# Altium PCB Schematic.pcbdoc
Units mm, origin at the board's own origin, x right, y up, seen from the top; angles counter-clockwise.
Board outline 74.8 x 54.3 mm, 2 copper layers (Top Layer, Bottom Layer); 33 components, 33 nets, 114 pads, 93 vias.
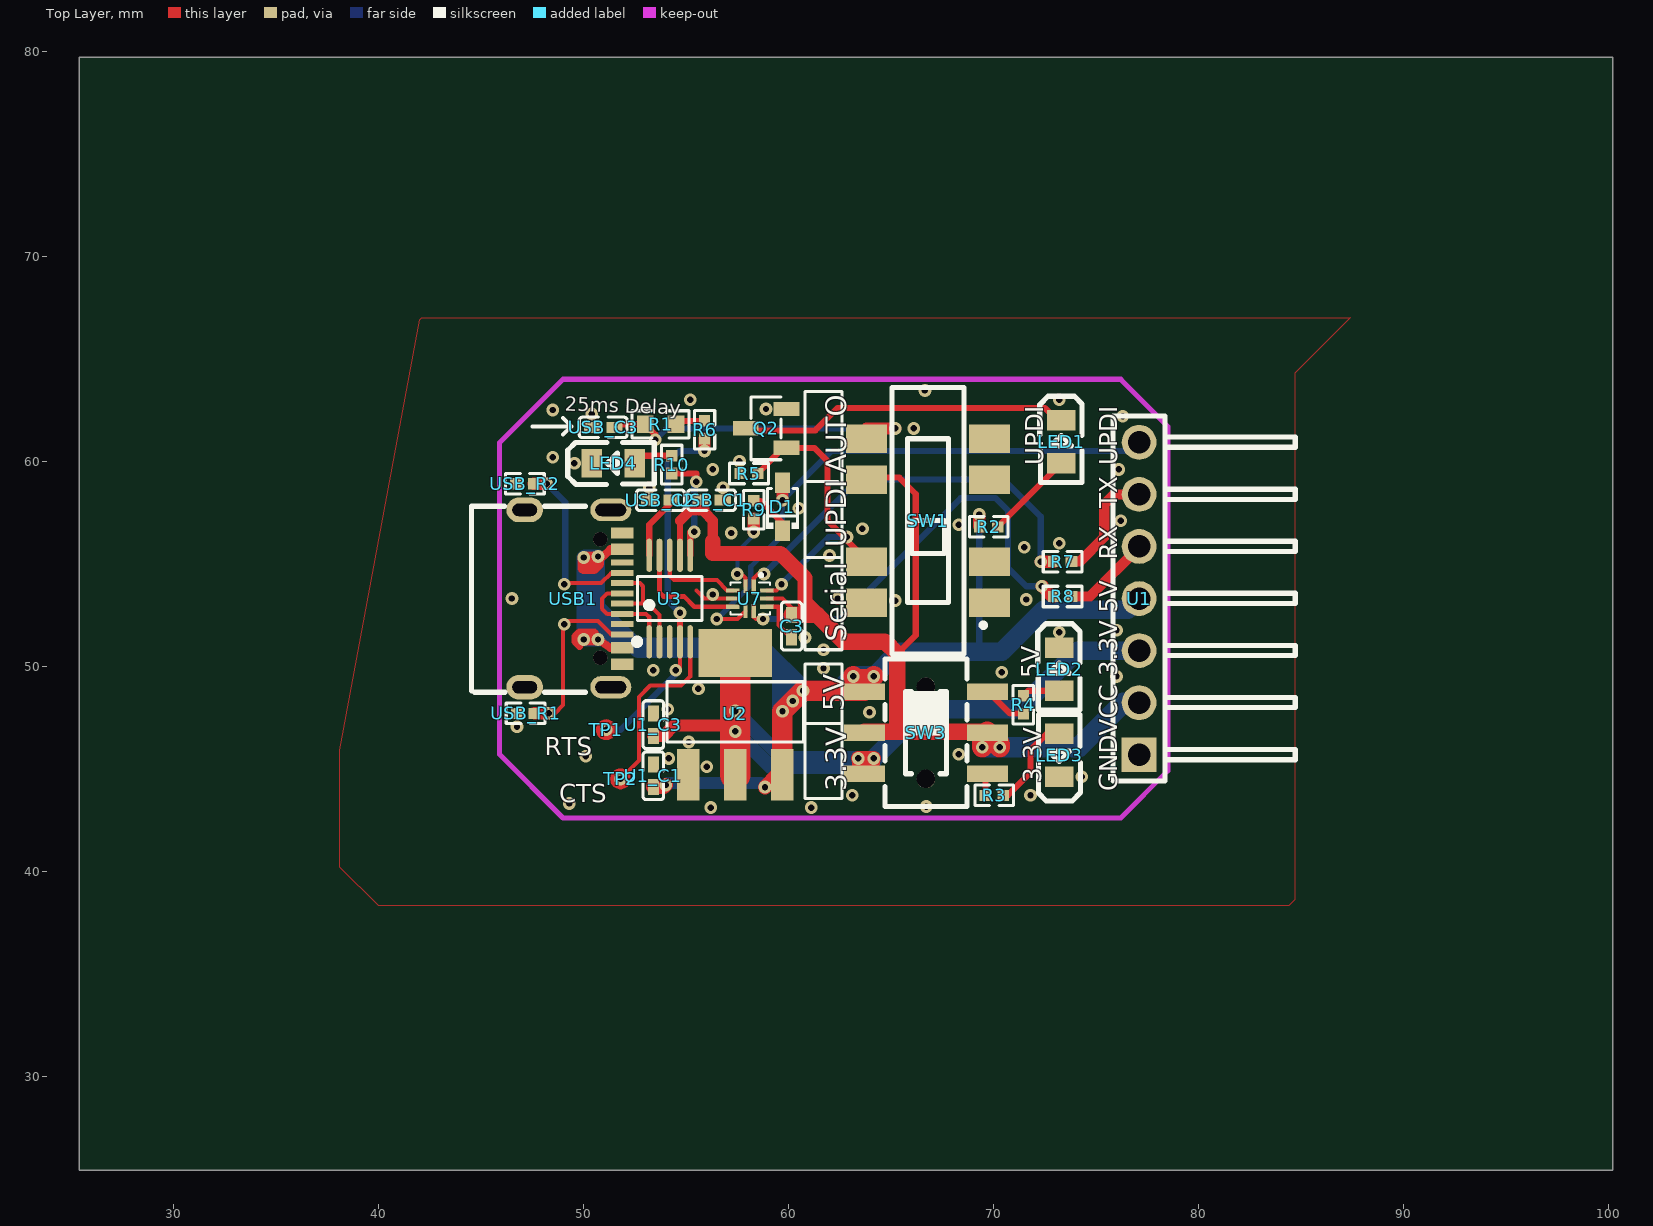
[diagram p0: Top Layer view]
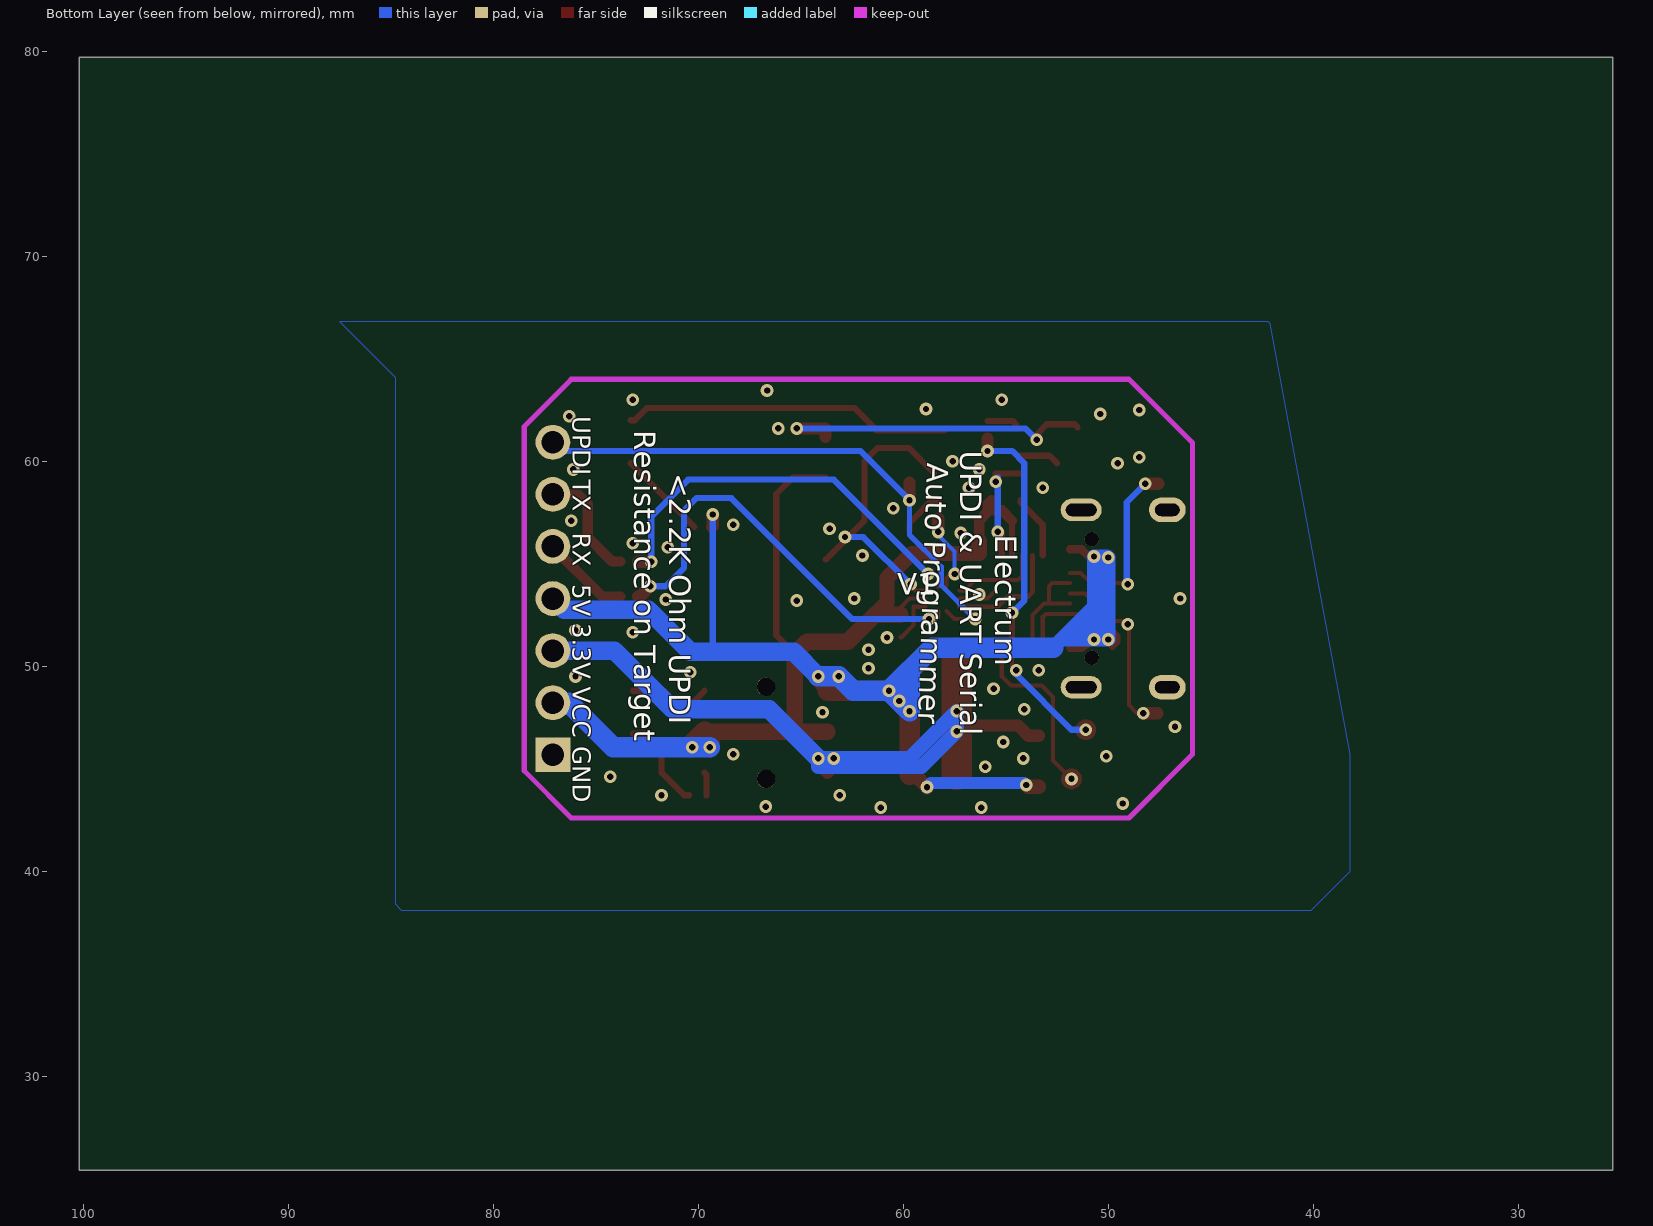
[diagram p1: Bottom Layer view, seen from below]

## Layer stack, top to bottom
Top Layer: signal copper (thickness not stored)
Dielectric: dielectric 0.32, FR-4, Dk 4.8
Bottom Layer: signal copper (thickness not stored)

## Board outline
100.2,25.4 25.4,25.4 25.4,79.7 100.2,79.7

## Components (designator, comment, footprint, x,y, rotation, side; value= is the part's Value field where it differs from the comment)
C3 "100nF" C0402 60.15,51.955 r90 top
D1 "1N5819WS" SOD-323_L1.8-W1.3-LS2.5-RD 59.7,57.772 r90 top
LED1 "Green" LED0805-R-RD 73.3,60.95 r270 top
LED2 "Red" LED0805-R-RD 73.2,49.85 r270 top
LED3 "Green" LED0805-R-RD 73.2,45.65 r90 top
LED4 "Green" LED0805-R-RD 51.45,59.9 r0 top
Q2 "AO3400A" SOT-23-3_L2.9-W1.3-P1.90-LS2.4-BR 58.9,61.6 r0 top
R1 "120kΩ" R0603 53.753,61.8 r0 top
R2 "2kΩ" R0402 69.767,56.8 r0 top
R3 "1kΩ" R0402 70.033,43.7 r0 top
R4 "1kΩ" R0402 71.45,48.117 r90 top
R5 "1MΩ" R0402 58.067,59.4 r180 top
R6 "5.1kΩ" R0402 55.9,61.533 r270 top
R7 "1kΩ" R0402 73.367,55.1 r0 top
R8 "1kΩ" R0402 73.367,53.4 r0 top
R9 "470Ω" R0402 58.3,57.633 r90 top
R10 "2kΩ" R0402 54.3,59.833 r90 top
SW1 "MST23D18G2 125" SW-SMD_SHOU_MST23D18G2 66.8,57.1 r90 top
SW3 "MS-22D28-G020" SW-SMD_MS-22D28-G020 66.7,46.75 r90 top
TP1 "TESTPOINT" TEST_TESTPOINT 51.1,46.9 r0 top
TP2 "TESTPOINT" TEST_TESTPOINT 51.8,44.5 r0 top
U1 "X6511WR-07H-C30D60R1" HDR-TH_7P-P2.54-H-M-W7.7-P 77.1,53.3 r90 top
U1_C1 "10uF" C0402 53.4,44.655 r90 top
U1_C3 "10uF" C0402 53.4,47.145 r270 top
U2 "AMS1117-3.3" SOT-223-3_L6.5-W3.4-P2.30-LS7.0-BR 57.4,47.67 r270 top
U3 "CH340E" MSOP-10_L3.0-W3.0-P0.50-LS5.0-BL 54.2,53.3 r0 top
U7 "RS2228XUTQK10" WQFN-10_L1.8-W1.4-P0.40-BL 58.1,53.3 r180 top
USB1 "TYPE-C 16PIN 2MD(073)" USB-C-SMD_TYPE-C-6PIN-2MD-073 49.5,53.3 r270 top
USB_C1 "100nF" C0402 56.245,58.1 r180 top
USB_C2 "100nF" C0402 53.745,58.1 r180 top
USB_C3 "100nF" C0402 50.955,61.65 r0 top
USB_R1 "5.1kΩ" R0402 47.167,47.7 r180 top
USB_R2 "5.1kΩ" R0402 47.133,58.9 r180 top

## Footprints (in the part's own frame and the unit in brackets; to place one, negate y for a bottom-side part, rotate by r counter-clockwise, add the part's x,y. Pads: shape width x height; smd on the part's side, far side on the other; paste and mask are expansions set on the pad)
C0402 [mm]
  rect 0.79x0.54 smd paste-100 mask+0.051: 1(-0.545,0) 2(0.545,0)
  silkscreen extent -1.17,-0.5 1.17,0.5
HDR-TH_7P-P2.54-H-M-W7.7-P [mm]
  rect 1.7x1.7 hole 1.1 paste+0 mask+0.05: 1(-7.62,0)
  round 1.7 hole 1.1 paste+0 mask+0.05: 2(-5.08,0) 3(-2.54,0) 4(0,0) 5(2.54,0) 6(5.08,0) 7(7.62,0)
  silkscreen extent -8.9,-7.62 8.9,1.27
LED0805-R-RD [mm]
  rect 1x1.4 smd paste+0 mask+0.051: 1(1.05,0) 2(-1.05,0)
  silkscreen extent -2.22,-1.04 1.99,1.01
MSOP-10_L3.0-W3.0-P0.50-LS5.0-BL [mm]
  oval 0.28x1.62 smd paste+0 mask+0.051: 1(-1,-2.11) 2(-0.5,-2.11) 3(0,-2.11) 4(0.5,-2.11) 5(1,-2.11) 6(1,2.11) 7(0.5,2.11) 8(0,2.11) 9(-0.5,2.11) 10(-1,2.11)
  silkscreen extent -1.74,-2.26 1.58,1.07
R0402 [mm]
  rect 0.566x0.54 smd paste-100 mask+0.051: 1(-0.433,0) 2(0.433,0)
  silkscreen extent -0.94,-0.5 0.94,0.5
R0603 [mm]
  rect 0.806x0.864 smd paste-100 mask+0.051: 1(-0.753,0) 2(0.753,0)
  silkscreen extent -1.39,-0.66 1.39,0.66
SOD-323_L1.8-W1.3-LS2.5-RD [mm]
  rect 1x0.75 smd paste+0 mask+0.051: 1(-1.173,0) 2(1.173,0)
  silkscreen extent -1.08,-0.8 0.9,0.8
SOT-23-3_L2.9-W1.3-P1.90-LS2.4-BR [mm]
  rect 1.25x0.7 smd paste+0 mask+0.051: 1(1,-0.95) 2(1,0.95) 3(-1,0)
  silkscreen extent -0.73,-1.53 0.73,1.53
SOT-223-3_L6.5-W3.4-P2.30-LS7.0-BR [mm]
  rect 2.5x1.1 smd paste+0 mask+0.051: 1(2.97,-2.3) 2(2.97,0) 3(2.97,2.3)
  rect 2.34x3.6 smd paste+0 mask+0.051: 4(-2.97,0)
  silkscreen extent -1.57,-3.33 1.37,3.33
SW-SMD_MS-22D28-G020 [mm]
  rect 0.8x2 smd paste+0 mask+0.051: 1(-2,3) 2(0,3) 3(2,3) 4(-2,-3) 5(0,-3) 6(2,-3)
  round 0.9 hole 0.9 unplated paste+0: ""(-2.25,0) ""(2.25,0)
  silkscreen extent -3.6,-2 3.6,2
SW-SMD_SHOU_MST23D18G2 [mm]
  rect 1.4x2 smd paste+0 mask+0.051: 1(-4,-3) 2(-2,-3) 3(2,-3) 4(4,-3) 5(4,3) 6(2,3) 7(-2,3) 8(-4,3)
  silkscreen extent -6.5,-2.8 6.5,1.75
TEST_TESTPOINT [mm]
  Top Layer region: -0.5,0 -0.496,0.06 -0.485,0.12 -0.468,0.177 -0.443,0.232 -0.411,0.284 -0.374,0.331 -0.331,0.374 -0.284,0.411 -0.232,0.443 -0.177,0.468 -0.12,0.485 -0.06,0.496 0,0.5 0,0.5 0.06,0.496 0.12,0.485 0.177,0.468 0.232,0.443 0.284,0.411 0.331,0.374 0.374,0.331 0.411,0.284 0.443,0.232 0.468,0.177 0.485,0.12 0.496,0.06 0.5,0 0.5,0 0.496,-0.06 0.485,-0.12 0.468,-0.177 0.443,-0.232 0.411,-0.284 0.374,-0.331 0.331,-0.374 0.284,-0.411 0.232,-0.443 0.177,-0.468 0.12,-0.485 0.06,-0.496 0,-0.5 0,-0.5 -0.06,-0.496 -0.12,-0.485 -0.177,-0.468 -0.232,-0.443 -0.284,-0.411 -0.331,-0.374 -0.374,-0.331 -0.411,-0.284 -0.443,-0.232 -0.468,-0.177 -0.485,-0.12 -0.496,-0.06
USB-C-SMD_TYPE-C-6PIN-2MD-073 [mm]
  rect 0.55x1.1 smd paste-100 mask+0.05: 1(-3.2,2.375) 2(-2.4,2.375) 11(2.4,2.375) 12(3.2,2.375)
  rect 0.3x1.1 smd paste-100 mask+0.05: 3(-1.75,2.375) 4(-1.25,2.375) 5(-0.75,2.375) 6(-0.25,2.375) 7(0.25,2.375) 8(0.75,2.375) 9(1.25,2.375) 10(1.75,2.375)
  oval 1.1x2 hole 0.6 slot 1.5 at 90 deg paste+0 mask+0.05: 13(-4.325,1.825) 14(4.325,1.825)
  oval 1.2x1.8 hole 0.6 slot 1.2 at 90 deg paste+0 mask+0.05: 13(-4.325,-2.375) 14(4.325,-2.375)
  round 0.7 hole 0.7 unplated paste+0: ""(-2.89,1.305) ""(2.891,1.305)
  silkscreen extent -4.5,-4.97 4.57,0.6
WQFN-10_L1.8-W1.4-P0.40-BL [mm]
  rect 0.2x0.75 smd paste+0 mask+0.051: 1(-0.2,-0.565)
  rect 0.2x0.665 smd paste+0 mask+0.051: 2(0.2,-0.607) 6(0.2,0.608) 7(-0.2,0.608)
  rect 0.665x0.2 smd paste+0 mask+0.051: 3(0.833,-0.4) 4(0.833,0) 5(0.833,0.4) 8(-0.832,0.4) 9(-0.832,0) 10(-0.832,-0.4)
  silkscreen extent -0.99,-1.21 0.93,0.79

## Via types
v1: diameter 0.62, hole 0.31, Top Layer to Bottom Layer, tented both sides, 93 vias

## Nets (pads, with @x,y where several pads share a name; then routed paths per layer and width w, separated by ;. In a path a pad name is that pad's centre, name@x,y a point inside that pad or via, vN(x,y) a via of type N, cw(c..) or ccw(c..) an arc to the next point about the centre after c; other vN are vias at no path point)
3.3V: SW3.1 U1.3 U1_C3.2 U2.2 U2.4 | length 45.3
  Top Layer w0.6: U1_C3.2 53.894,46.599 54.399,47.105 v1@57.399,47.105 ; v1(63.4,45.5) 63.4,45.1 63.7,44.8 64.15,45.25 v1(64.15,45.5)
  Top Layer w0.7: v1(63.4,45.5) v1(64.15,45.5)
  Top Layer w1: v1(57.4,46.818) v1(57.4,47.808)
  Top Layer w1.5: U2.2 U2.4
  Bottom Layer w0.7: v1(57.4,46.818) v1(57.4,47.808) 59.708,45.5 v1(63.4,45.5) v1(64.15,45.5) 64.15,45.1 59.118,45.1 v1(57.4,46.818)
  Bottom Layer w0.9: v1(64.15,45.5) 66.55,47.9 71.25,47.9 74.11,50.76 U1.3
5V: R2.1 SW3.3 U1.4 U1_C1.1 U2.3 USB1.2 USB1.11 | length 79.1
  Top Layer w0.4: v1(50,51.3) 49.901,51.199 49.799,50.999 49.601,51.199 49.601,51.451 49.799,51.649 50.5,51.649 v1(50.7,51.3) ; v1(50.7,51.3) 51.3,50.9 USB1.11 ; v1(50.7,55.35) 50.95,55.35 51.3,55.7 USB1.2
  Top Layer w0.6: v1(50,51.3) v1(50.7,51.3) ; v1(69.3,57.4) 69.3,56.834 R2.1 ; 50,54.8 50.5,54.8 50.7,55 v1(50.7,55.35) 50.65,55.3 v1(50,55.3) 50,54.8
  Top Layer w0.7: U1_C1.1 53.91,44.11 v1(54,44.2) ; v1(58.85,44.1) 59.45,44.7 U2.3 ; v1(63.15,49.5) v1(64.15,49.5)
  Top Layer w1: U2.3 v1(59.7,47.8) v1(60.198,48.298) v1(60.7,48.8) SW3.3@63.7,48.8 ; v1(63.15,49.5) 63.7,48.95 SW3.3@63.7,48.8 ; v1(64.15,49.5) 63.7,49.05 SW3.3@63.7,48.8
  Bottom Layer w0.3: 69.3,50.699 v1(69.3,57.4)
  Bottom Layer w0.6: v1(54,44.2) 54.1,44.3 58.65,44.3 v1(58.85,44.1)
  Bottom Layer w0.7: v1(50.7,51.3) 50,52.002 ; 51.3,51.8 51.2,51.8 v1(50.7,51.3) ; 50,52.002 v1(50,55.3) 50.05,55.35 v1(50.7,55.35) 50.7,52.9 ; 50,52.002 v1(50,51.3) v1(50.7,51.3) ; v1(50.7,51.3) 52.3,51.3 52.7,50.9 50.7,52.9 ; v1(50.7,51.3) 50.7,52.9
  Bottom Layer w0.9: v1(64.15,49.5) 65.349,50.699 70.399,50.699 72.451,52.749 76.548,52.749 U1.4
  Bottom Layer w1: 52.7,50.9 58.6,50.9 v1@60.701,48.799 ; 59.698,49.802 v1(59.7,47.8) v1(60.7,48.8) 62.45,48.8 v1(63.15,49.5) v1(64.15,49.5)
CTS: U3.5 | length 9
  Top Layer w0.2: v1(51.8,44.5) 52.7,45.4 52.7,48.5 53.25,49.05 54.75,49.05 55.2,49.5 U3.5@55.2,51.19
D1_1: D1.1 R9.2 | length 2.2
  Top Layer w0.3: R9.2 58.633,58.065 59.7,57.001 D1.1
DN: U3.2 USB1.5 USB1.7 | length 5.3
  Top Layer w0.2: USB1.7 53.15,53.05 53.7,52.5 U3.2@53.7,51.19 ; USB1.5 52.751,54.049 52.901,53.899 52.896,53.051
DP: U3.1 USB1.6 USB1.8 | length 5.3
  Top Layer w0.2: USB1.6@51.875,53.549 51.151,53.549 50.899,53.3 50.899,52.8 51.151,52.551 USB1.8 53.05,52.55 53.2,52.4 U3.1@53.2,51.19
GND: C3.1 LED2.2 LED3.2 LED4.2 Q2.2 R5.2 SW1.8 U1.1 U1_C1.2 U1_C3.1 U2.1 U3.3 U7.4 U7.8 USB1.1 USB1.12 USB1.13 USB1.14 USB_C1.1 USB_C2.2 USB_C3.1 USB_R1.2 USB_R2.2 | length 4.3
  Top Layer w0.2: 55.5,53.7 55.9,53.3 U7.4 ; U7.8 59.5,52.901 59.5,51.999 60.089,51.41 C3.1
  other v1: 56.2,43.1 61.1,43.1 66.715,43.15 49.3,43.3 63.1,43.7 71.8,43.7 74.3,44.6 56,45.1 54.15,45.5 50.1,45.6 68.3,45.7 55.128,46.298 46.75,47.05 63.95,47.75 54.1,47.9 55.6,48.9 76,49.5 70.4,49.7 53.4,49.8 61.7,49.9 61.7,50.8 60.8,51.4 73.2,51.65 76,51.75 65.2,53.2 71.6,53.25 46.5,53.3 62.4,53.3 56.3,53.5 62,55.4 71.5,55.8 73.2,56 57.2,56.5 63.6,56.7 68.3,56.9 76.2,57.1 60.5,57.7 53.2,58.7 56.8,58.7 56.3,59.6 76.1,59.6 49.55,59.9 57.6,60 48.5,60.2 66.1,61.6 76.3,62.2 50.4,62.3 48.5,62.5 58.9,62.55 55.2,63 73.2,63 66.65,63.45
LED1_1: LED1.1 R2.2 | length 4.4
  Top Layer w0.3: R2.2 LED1.1
LED1_2: LED1.2 Q2.3 | length 16.1
  Top Layer w0.3: Q2.3 58.001,61.499 61.3,61.499 62.4,62.599 72.499,62.599 73.099,61.999 LED1.2
LED4_1: LED4.1 R10.2 | length 2
  Top Layer w0.3: LED4.1 52.866,60.266 R10.2
LEDGREEN: R3.1 SW3.4 | length 1.1
  Top Layer w0.3: R3.1 69.6,44.7 SW3.4@69.7,44.8
LEDRED: R4.1 SW3.6 | length 2.2
  Top Layer w0.3: SW3.6@69.7,48.8 70.816,47.684 R4.1
R1_2: R1.2 R6.1 | length 1.5
  Top Layer w0.3: R1.2 54.672,61.966 R6.1
R3_2: LED3.1 R3.2 | length 4.6
  Top Layer w0.3: R3.2 70.7,43.7 71.8,44.8 71.8,45.9 72.6,46.7 LED3.1
R4_2: LED2.1 R4.2 | length 1.9
  Top Layer w0.3: R4.2 71.7,48.8 LED2.1
RTS: R6.2 U3.4 | length 17.9
  Top Layer w0.2: v1(54.5,49.8) 54.7,49.8 U3.4@54.7,51.19
  Top Layer w0.3: U3.4@54.7,51.19 v1(54.7,52.6)
  Top Layer w0.6: v1(55.9,60.5) R6.2
  Bottom Layer w0.3: v1(51.1,46.9) 51.8,46.9 54.5,49.6 v1(54.5,49.8) ; v1(54.7,52.6) 54.1,53.2 54.1,59.9 54.7,60.5 v1(55.9,60.5)
RXD: R8.2 U1.5 | length 4.3
  Top Layer w0.5: R8.2 74.7,53.4 77.1,55.8 U1.5
RXD_CH340: U3.9 U7.5 | length 5.7
  Top Layer w0.23: U3.9 53.701,53.6 53.901,53.399 54.9,53.399 55.4,52.899 U7.5@57.267,52.899
S: Q2.1 R5.1 SW1.7 U7.10 | length 14.8
  Top Layer w0.2: U7.10 59.4,53.7 59.65,53.95 v1(59.65,54)
  Top Layer w0.3: R5.1 59.75,60.65 Q2.1 61.25,60.65 61.9,60 61.9,57.1 SW1.7@63.8,55.2
  Bottom Layer w0.3: v1(59.65,54) 61.95,56.3 v1(62.85,56.3)
S$67284: 
S$79420: 
SW1_5: R1.1 SW1.5 USB_C3.2 | length 16.2
  Top Layer w0.3: USB_C3.2 51.65,61.8 R1.1 53.5,61.3 v1(53.5,61.05)
  Top Layer w0.6: SW1.5@63.8,61.2 63.8,61.6 v1(65.2,61.6)
  Bottom Layer w0.3: v1(53.5,61.05) 54.05,61.6 v1(65.2,61.6)
TXD: R7.2 U1.6 | length 5.6
  Top Layer w0.5: R7.2 74.201,55.101 75.4,56.3 75.4,57.9 75.88,58.38 U1.6
TXD_CH340: U3.8 U7.3 | length 4.4
  Top Layer w0.2: U3.8 54.201,54.4 54.399,54.199 56.5,54.199 57,53.699 U7.3@57.267,53.699
U3_6: R10.1 U3.6 | length 5.8
  Top Layer w0.3: R10.1 55.5,59.4 v1(55.5,59) ; U3.6 55.2,56.55 v1(55.4,56.55)
  Bottom Layer w0.3: v1(55.4,56.55) 55.4,59.2 55.5,59.1 v1(55.5,59)
U7_1: R7.1 U7.1 | length 20
  Top Layer w0.2: U7.1@58.301,53.864 58.301,54.301 58.499,54.499 v1@58.801,54.499
  Top Layer w0.6: v1(72.3,55.1) R7.1
  Bottom Layer w0.3: v1@58.801,54.499 63.401,59.099 70.5,59.099 72.299,57.3 v1@72.299,55.101
  other v1: 58.8,54.5
U7_2: R9.1 U7.2 | length 3.9
  Top Layer w0.2: v1(57.5,54.5) 57.7,54.5 57.9,54.3 U7.2
  Top Layer w0.6: v1(58.3,56.55) R9.1
  Bottom Layer w0.2: v1@57.501,54.499 57.501,55.599 58.301,56.399 v1@58.301,56.549
U7_7: R8.1 U7.7 | length 21.1
  Top Layer w0.2: U7.7 58.3,52.4 58.4,52.3 v1(58.75,52.3)
  Top Layer w0.6: v1(72.35,53.9) 72.85,53.4 R8.1 ; v1(72.35,53.9) v1@72.4,53.9
  Bottom Layer w0.3: v1@58.75,52.299 62.499,52.299 68.4,58.2 70.099,58.2 70.701,57.6 70.701,54.801 71.6,53.899 v1(72.35,53.9)
UPDI: D1.2 U1.7 U7.6 | length 28.3
  Top Layer w0.2: v1(56.5,52.3) 57.508,52.3 U7.6
  Top Layer w0.6: v1(59.7,58.1) D1.2
  Bottom Layer w0.25: v1(56.5,52.3) 58.15,53.95 58.15,54.85 59.7,56.4 v1(59.7,58.1)
  Bottom Layer w0.3: v1(59.7,58.1) 62.101,60.501 77.099,60.501 U1.7
USB_C2_1: U3.10 USB_C2.1 | length 3.1
  Top Layer w0.3: U3.10 53.2,56.9 54.29,57.99 USB_C2.1
USB_R1_1: USB1.10 USB_R1.1 | length 8.8
  Top Layer w0.2: v1(48.3,47.7) 48.6,47.7 49,48.1 49,52 v1(49.05,52.05) 49.05,52.2 50.701,52.2 51.349,51.55 USB1.10
  Top Layer w0.6: USB_R1.1 v1(48.3,47.7)
USB_R2_1: USB1.4 USB_R2.1 | length 9
  Top Layer w0.2: v1(49.05,54) 49.05,54.05 50.849,54.05 51.349,54.55 USB1.4
  Top Layer w0.6: USB_R2.1 v1(48.2,58.9)
  Bottom Layer w0.3: v1(48.2,58.9) 49.101,57.999 49.101,54.051 v1(49.05,54)
VCC: C3.2 SW1.6 SW3.2 SW3.5 U1.2 U3.7 U7.9 USB_C1.2 | length 53.2
  Top Layer w0.2: U7.9 59.7,53.3 60.15,52.85 C3.2
  Top Layer w0.3: U3.7 54.7,57.1 USB_C1.2 ; SW1.6@63.8,59.2 65.4,59.2 66.2,58.4 66.2,51.51 65.295,50.605
  Top Layer w0.5: 54.699,57.1 55.202,57.603 55.796,57.603 55.9,57.501 ; USB_C1.2 55.9,57.9 55.9,57.5 ; 56.3,56.1 56.3,57.1 55.9,57.5
  Top Layer w0.75: 56.3,56.1 56.299,55.5 59.599,55.5 60.8,54.301 60.8,53.099 61.4,52.5
  Top Layer w0.8: C3.2 61.4,52.5 62.7,51.199 64.699,51.199 65.296,50.605 65.296,46.8 ; SW3.2@63.7,46.8 SW3.5@69.7,46.8
  Top Layer w1: v1(69.45,46.05) 69.45,46.55 69.7,46.8 70.3,46.2 v1(70.3,46.05)
  Bottom Layer w1: v1(69.45,46.05) v1(70.3,46.05) 74.15,46.051 76.32,48.22 U1.2
pads on no net: SW1.1 SW1.2 SW1.3 SW1.4 SW3. USB1. USB1.3 USB1.9

## Polygon pours and split planes (outlines as drawn)
GND on Bottom Layer (solid): 42.1,66.7 42.2,66.8 87.5,66.8 84.8,64.1 84.8,38.4 84.5,38.1 40.1,38.1 38.2,40 38.2,45.7
GND on Top Layer (solid): 42,66.9 42.1,67 87.4,67 84.7,64.3 84.7,38.6 84.4,38.3 40,38.3 38.1,40.2 38.1,45.9

## Silkscreen, mask and mechanical layers (free items; w line width, h text height)
Top Overlay:
  lines w0.15: 60.8,43.55 62.6,43.55 62.6,50.1 60.8,50.1 60.8,43.55 ; 60.8,50.8 62.6,50.8 62.6,63.4 60.8,63.4 60.8,50.8
  lines w0.15 net S$67284: 60.8,59 62.4,59 ; 60.875,47.2 62.525,47.2 ; 60.9,55.3 62.55,55.3
  lines w0.2 net S$79420: 47.501,61.7 49.401,61.7 ; 49,61.3 49.401,61.7 ; 49.401,61.7 48.999,62.101 49.401,61.7
  text "25ms Delay" at 49.088,62.45 h0.7 r358
  text "UPDI" at 72.435,59.8 h0.87 r90
  text "UPDI" at 76.035,59.8 h0.87 r90
  text "AUTO" at 62.8,59.4 h1 r90
  text "TX" at 76.035,57.7 h0.87 r90
  text "UPDI" at 62.8,55.8 h1 r90
  text "RX" at 76.035,55.2 h0.87 r90
  text "5V" at 76.035,52.6 h0.87 r90
  text "Serial" at 62.8,51.2 h1 r90
  text "3.3V" at 76.035,49.5 h0.87 r90
  text "5V" at 72.235,49.4 h0.87 r90
  text "5V" at 62.7,47.8 h1 r90
  text "VCC" at 76.035,46.6 h0.87 r90
  text "RTS" at 48.1,45.665 h0.87
  text "3.3V" at 72.335,44.3 h0.87 r90
  text "3.3V" at 62.8,43.9 h1 r90
  text "GND" at 76.035,43.9 h0.87 r90
  text "CTS" at 48.8,43.365 h0.87
Bottom Overlay:
  text "UPDI" at 76.135,62.2 h0.87 r90
  text "Resistance on Target" at 73.125,61.5 h1.05 r90
  text "UPDI & UART Serial" at 57.225,60.5 h1.05 r90
  text "Auto Programmer" at 58.825,59.918 h1.05 r92
  text "<2.2K Ohm UPDI" at 71.425,59.4 h1.05 r90
  text "TX" at 76.135,59.1 h0.87 r90
  text "RX" at 76.135,56.5 h0.87 r90
  text "Electrum" at 55.525,56.4 h1.05 r90
  text "5V" at 76.135,54 h0.87 r90
  text "V1" at 60.3,53.475 h1.05
  text "3.3V" at 76.135,52.1 h0.87 r90
  text "VCC" at 76.135,49 h0.87 r90
  text "GND" at 76.135,46.1 h0.87 r90